# Altium PCB PCB.PcbDoc
Units mil, origin at the board's own origin, x right, y up, seen from the top; angles counter-clockwise.
Board outline 3937.01 x 3543.31 mil, 2 copper layers (Top Layer, Bottom Layer); 61 components, 49 nets, 220 pads, 51 vias.
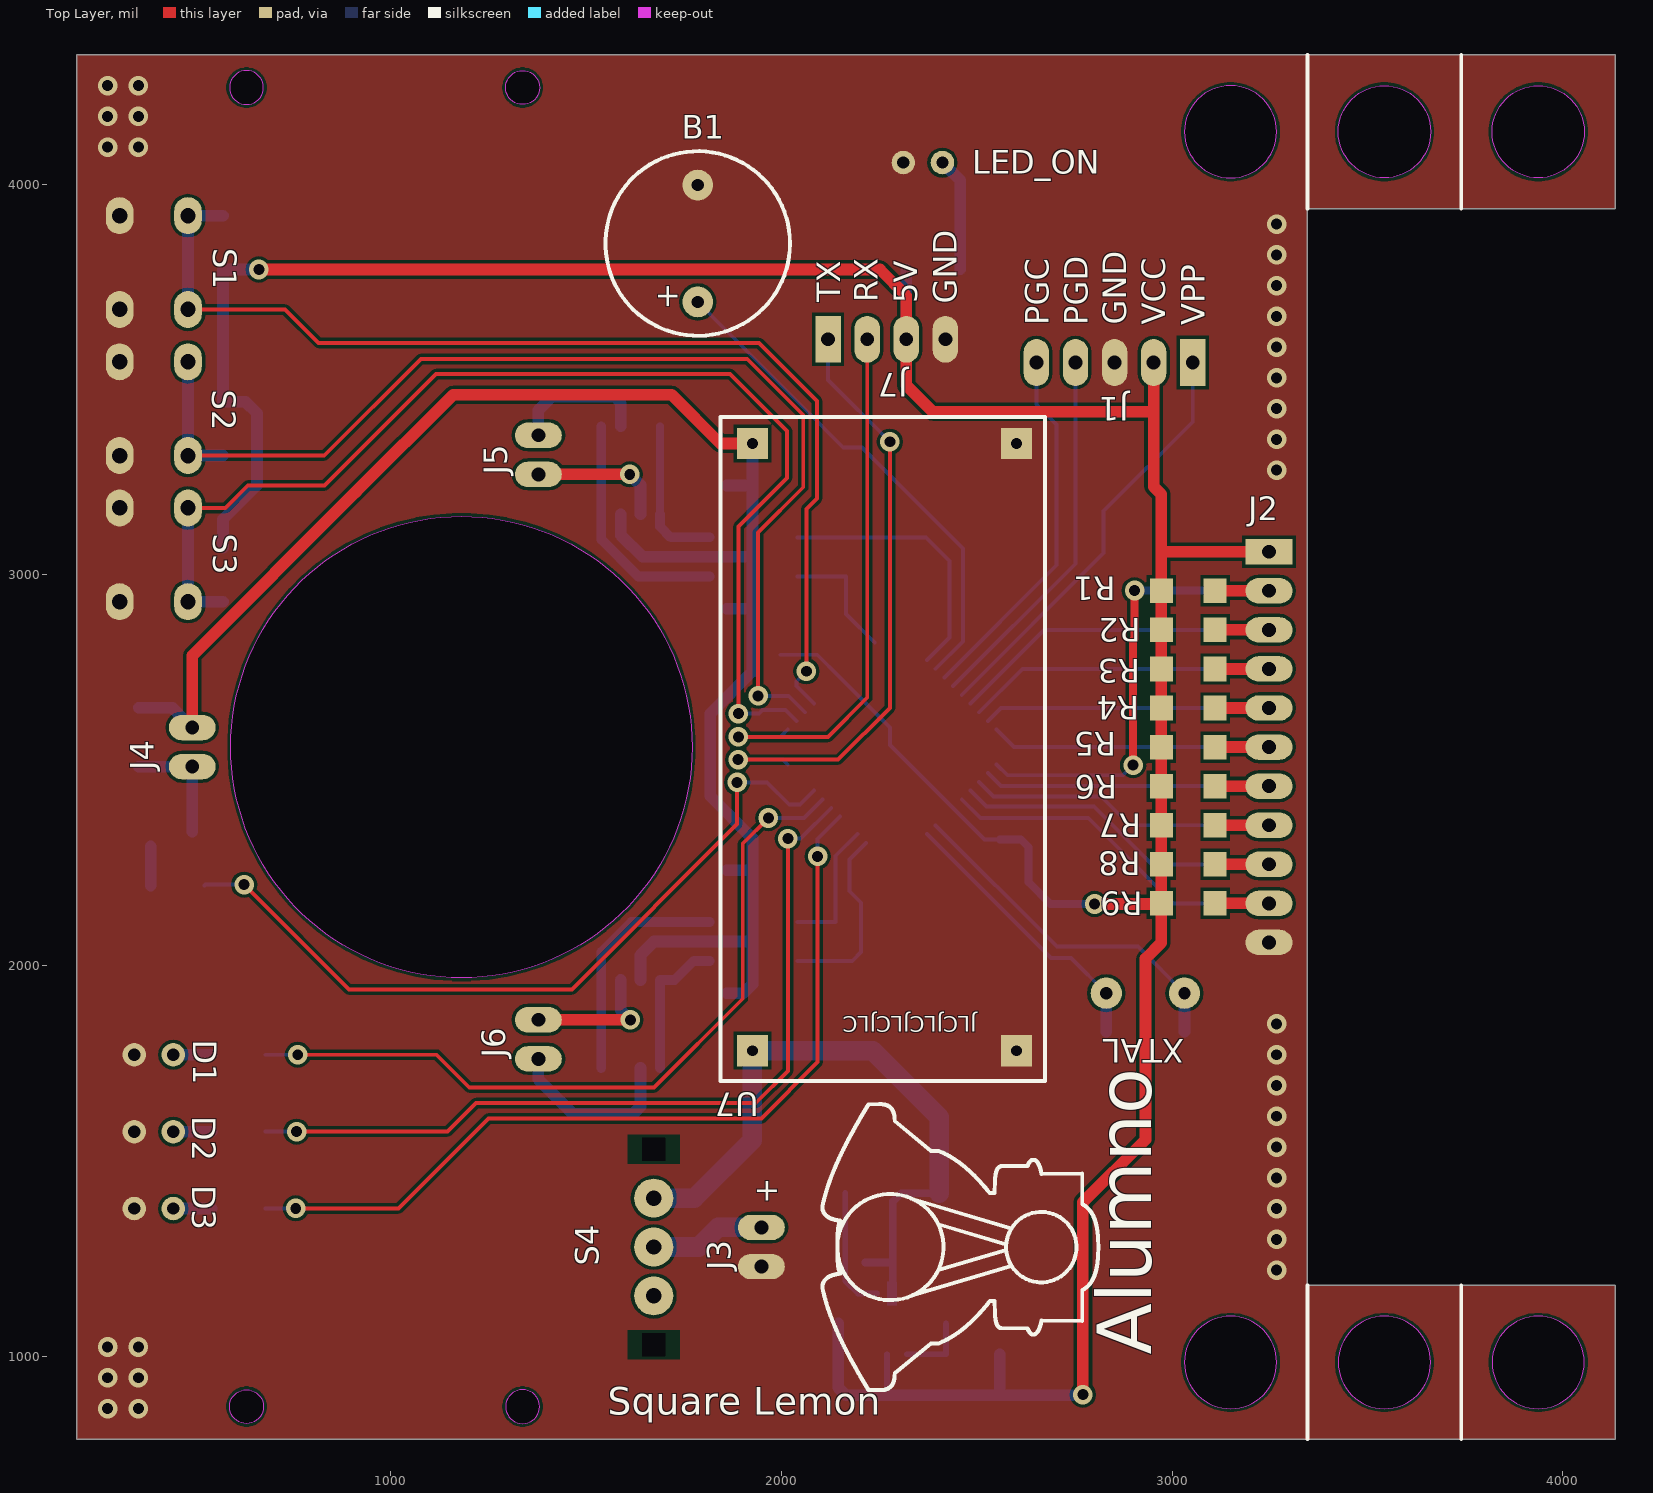
[diagram p0: Top Layer view]
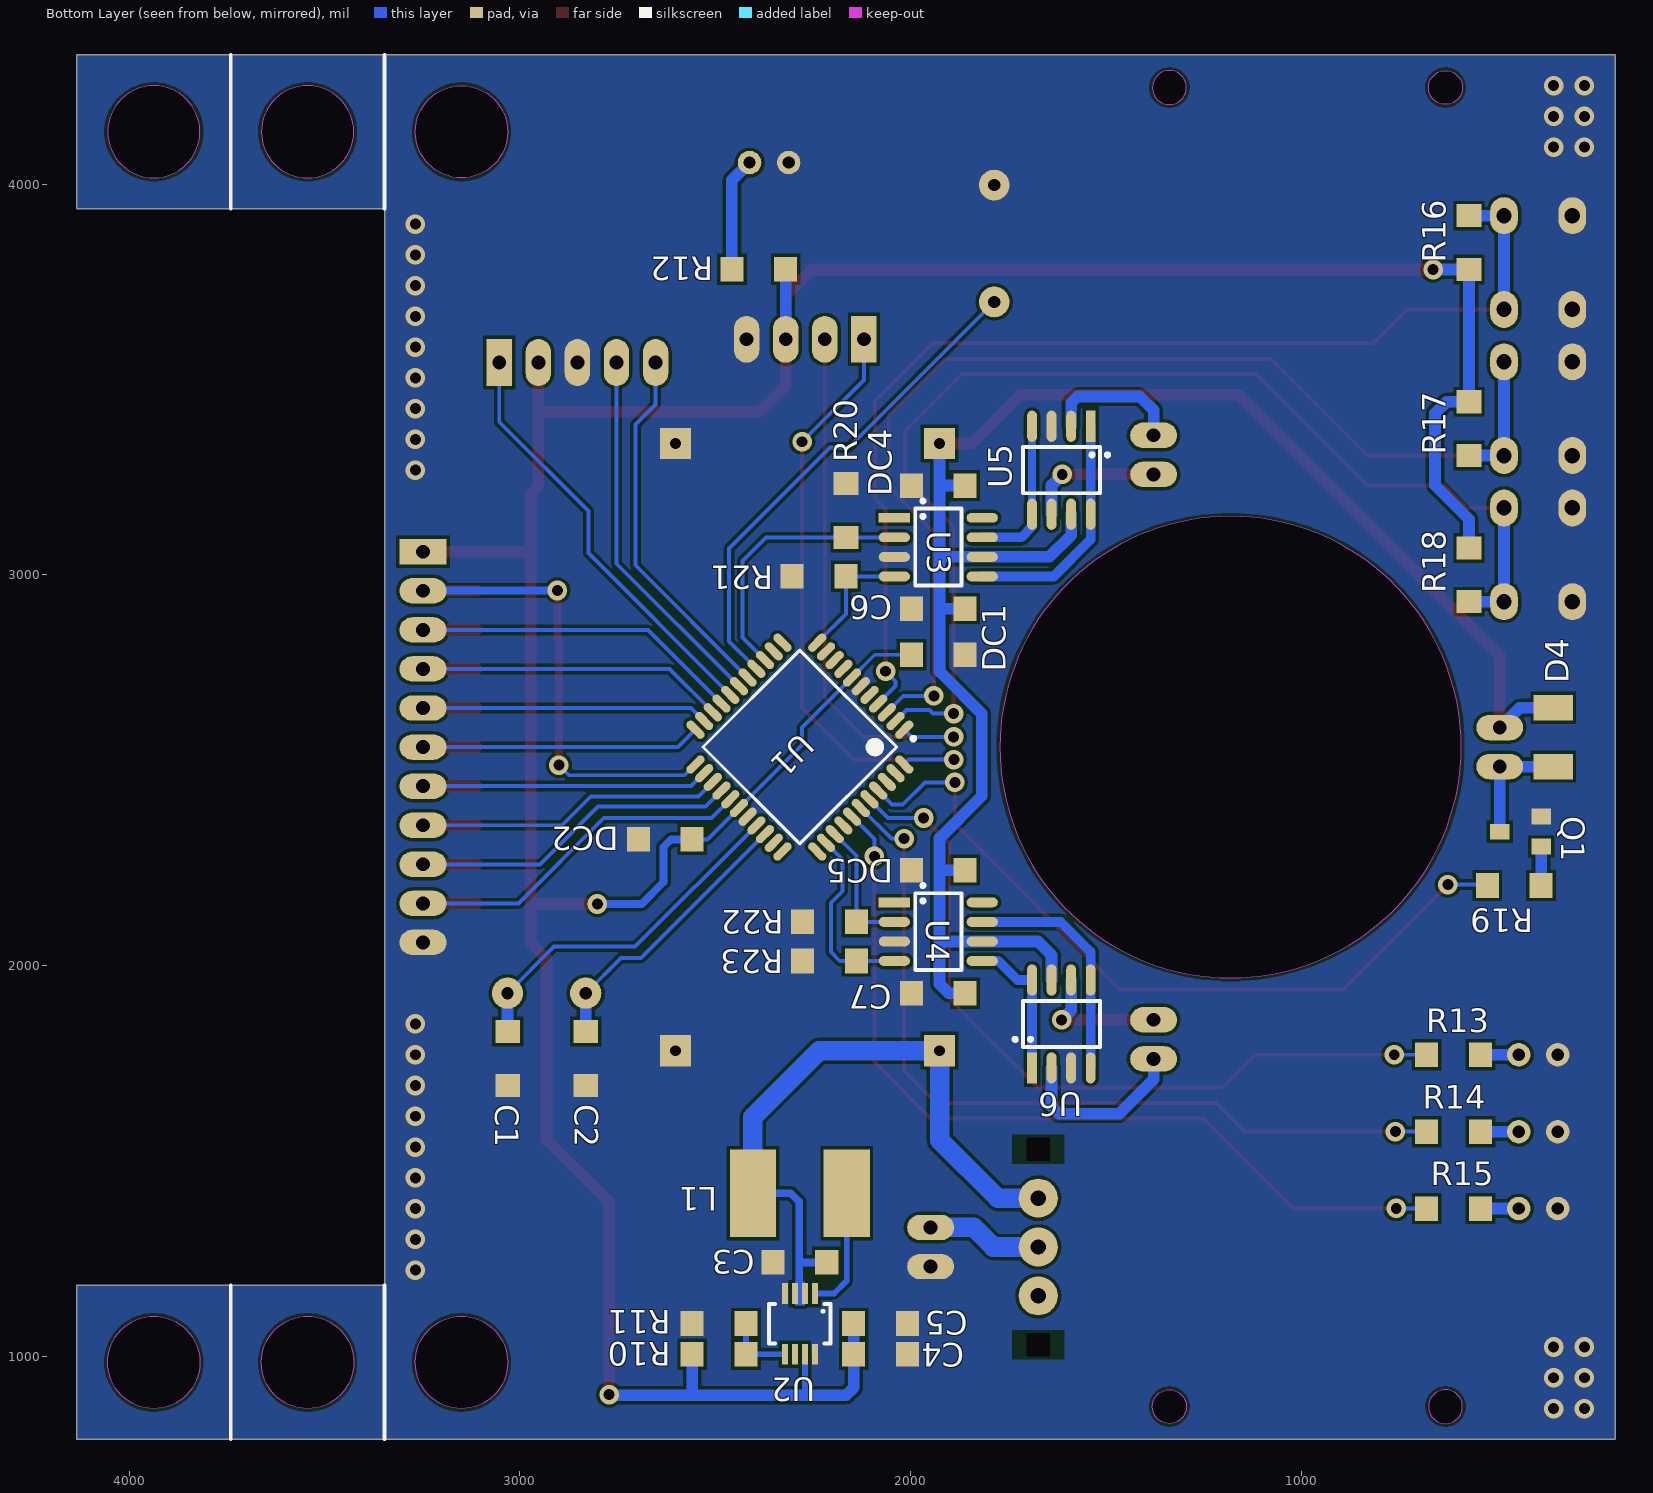
[diagram p1: Bottom Layer view, seen from below]
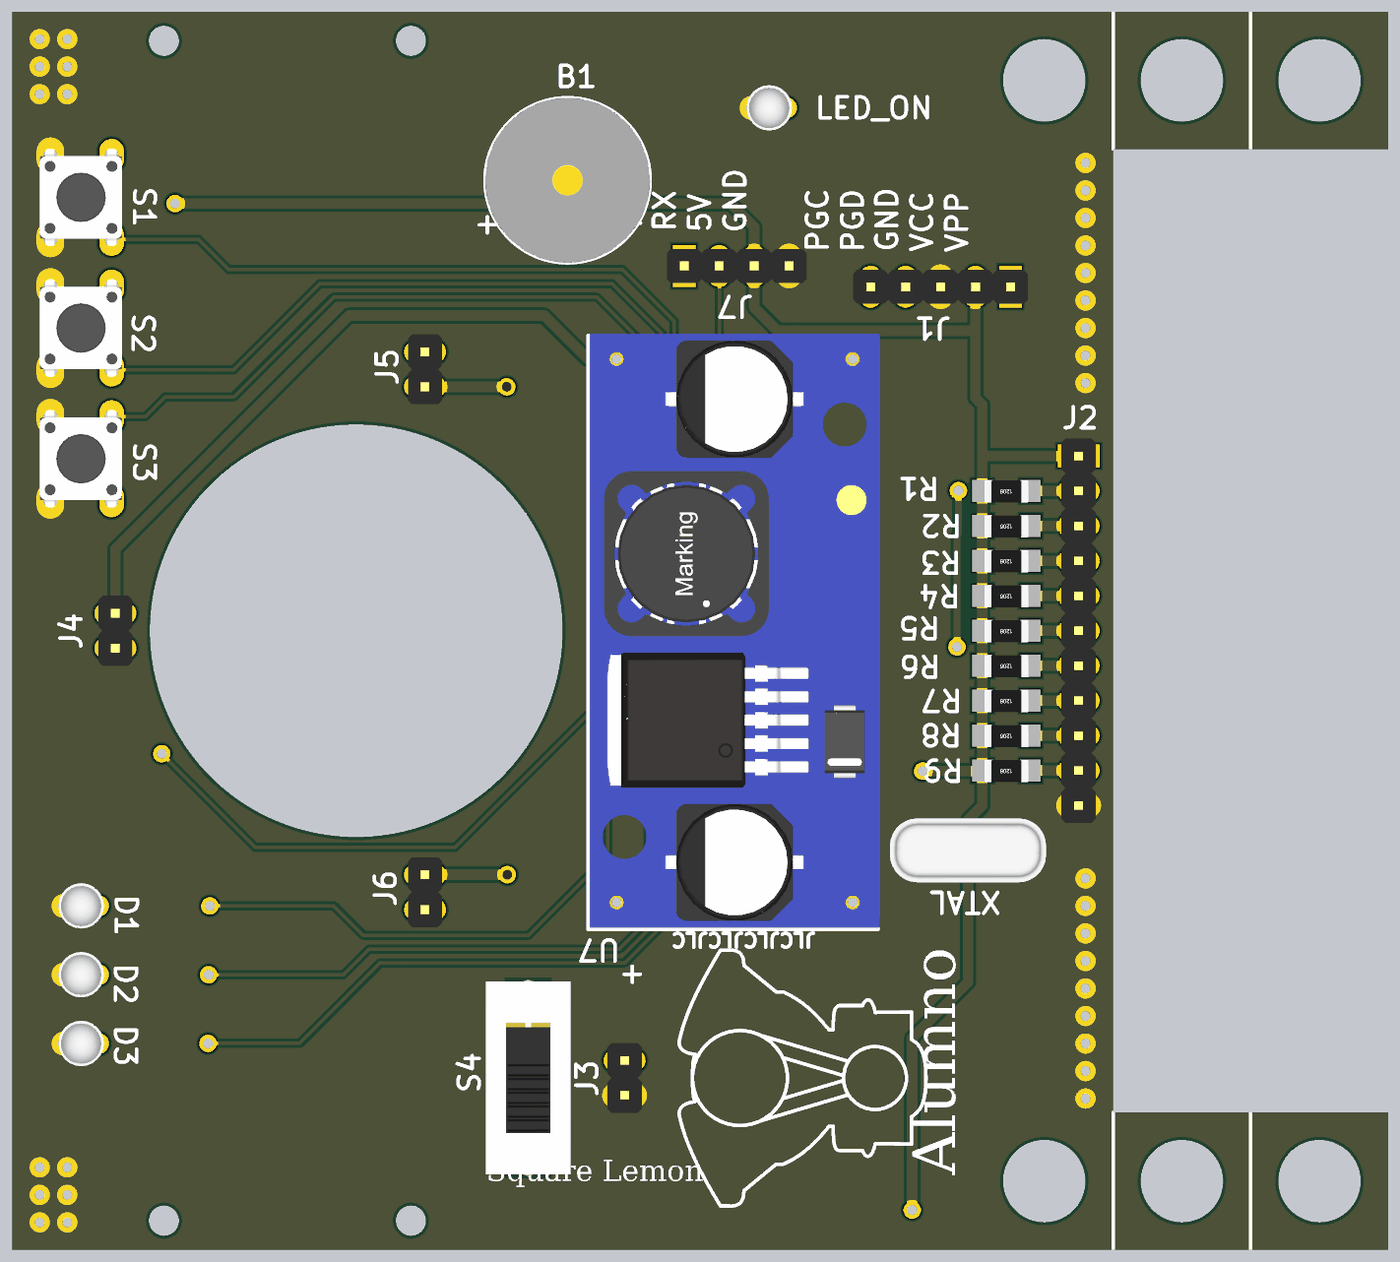
[diagram p2: 3D render of the assembled board from above, using the file's embedded part models]
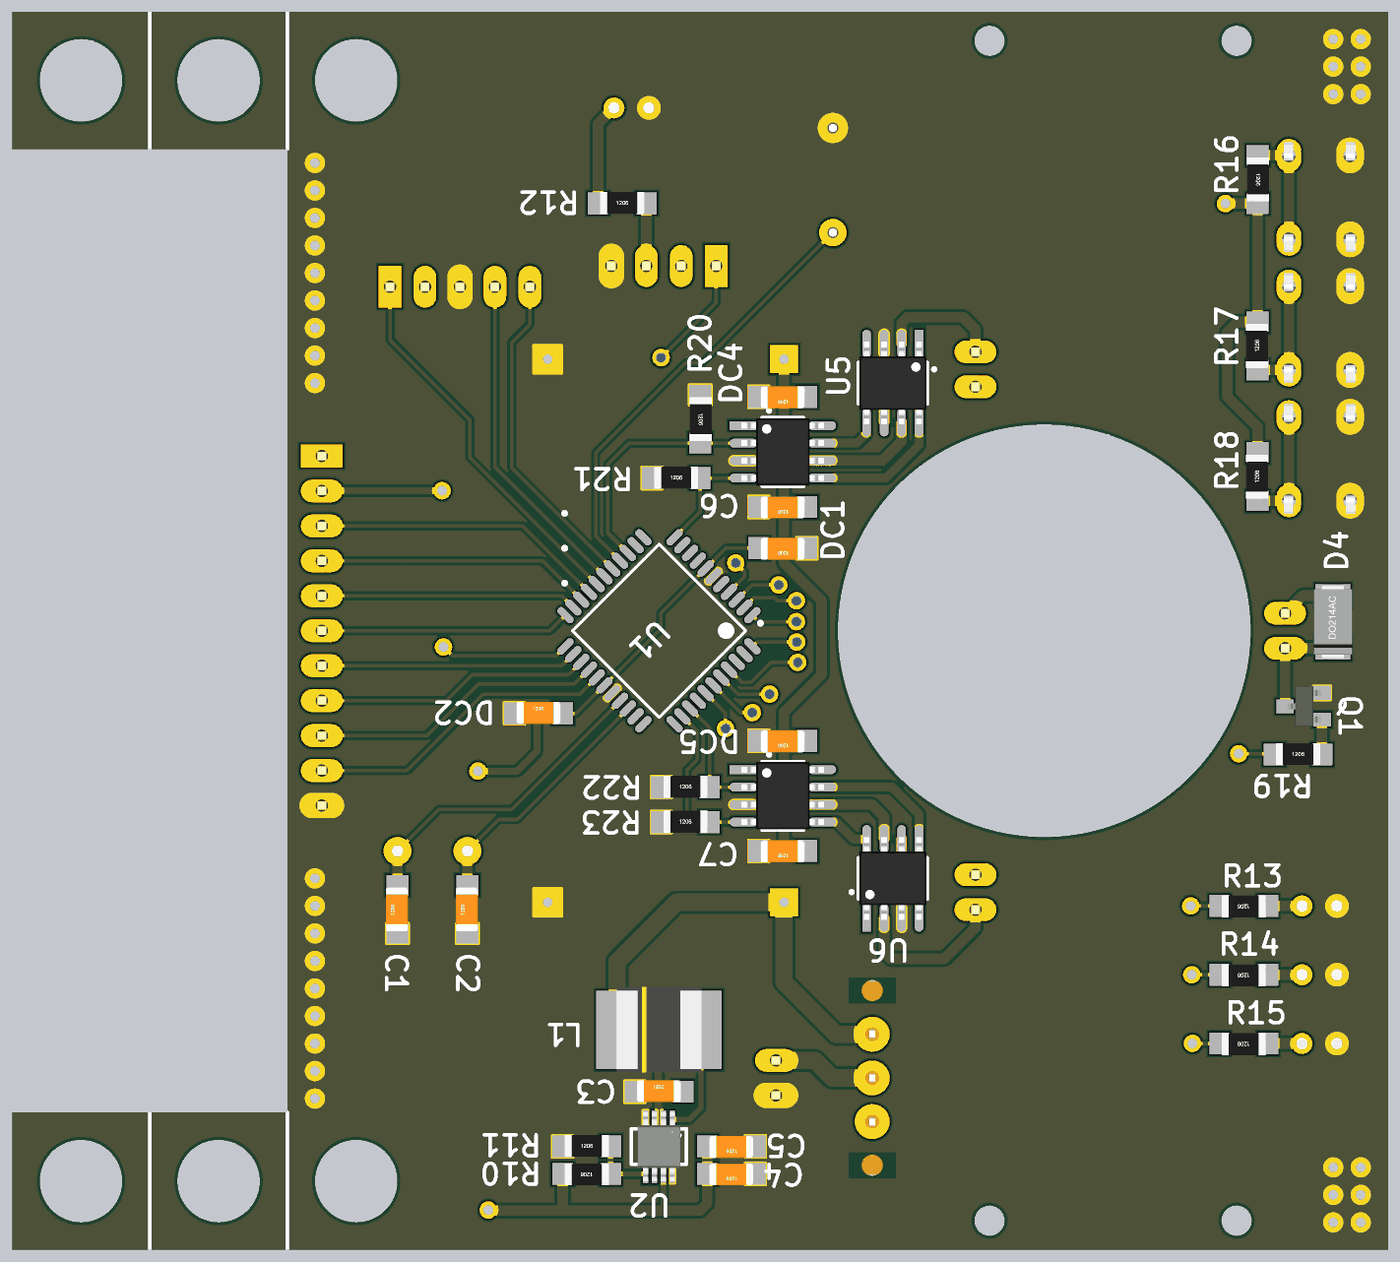
[diagram p3: 3D render of the assembled board from below, using the file's embedded part models]

## Layer stack, top to bottom
Top Solder: solder mask 0.4, Solder Resist, Dk 3.5
Top Layer: signal copper 1.4
Dielectric 1: dielectric 12.6, FR-4, Dk 4.8
Bottom Layer: signal copper 1.4
Bottom Solder: solder mask 0.4, Solder Resist, Dk 3.5

## Board outline
196.85,787.4 196.85,4330.71 4133.86,4330.71 4133.86,3937.01 3346.46,3937.01 3346.46,1181.1 4133.86,1181.1 4133.86,787.4 3346.46,787.4
cut-out: 630.91,4290.35 ccw(c630.91,4247.05) 587.6,4247.05 ccw(c630.91,4247.05) 630.91,4203.74 ccw(c630.91,4247.05) 674.21,4247.05 ccw(c630.91,4247.05)
cut-out: 1294.29,4247.05 cw(c1337.6,4247.05) 1337.6,4290.35 cw(c1337.6,4247.05) 1380.91,4247.05 cw(c1337.6,4247.05) 1337.6,4203.74 cw(c1337.6,4247.05)
cut-out: 1294.29,871.06 ccw(c1337.6,871.06) 1337.6,827.76 ccw(c1337.6,871.06) 1380.91,871.06 ccw(c1337.6,871.06) 1337.6,914.37 ccw(c1337.6,871.06)
cut-out: 630.91,827.76 cw(c630.91,871.06) 587.6,871.06 cw(c630.91,871.06) 630.91,914.37 cw(c630.91,871.06) 674.21,871.06 cw(c630.91,871.06)
cut-out: 3543.31,4015.75 cw(c3543.31,4133.86) 3425.2,4133.86 cw(c3543.31,4133.86) 3543.31,4251.97 cw(c3543.31,4133.86) 3661.42,4133.86 cw(c3543.31,4133.86)
cut-out: 3425.2,984.25 ccw(c3543.31,984.25) 3543.31,866.14 ccw(c3543.31,984.25) 3661.42,984.25 ccw(c3543.31,984.25) 3543.31,1102.36 ccw(c3543.31,984.25)
cut-out: 3818.9,984.25 ccw(c3937.01,984.25) 3937.01,866.14 ccw(c3937.01,984.25) 4055.12,984.25 ccw(c3937.01,984.25) 3937.01,1102.36 ccw(c3937.01,984.25)
cut-out: 1181.1,1968.5 cw(c1181.1,2559.05) 590.55,2559.05 cw(c1181.1,2559.05) 1181.1,3149.61 cw(c1181.1,2559.05) 1771.65,2559.05 cw(c1181.1,2559.05)
cut-out: 3937.01,4015.75 cw(c3937.01,4133.86) 3818.9,4133.86 cw(c3937.01,4133.86) 3937.01,4251.97 cw(c3937.01,4133.86) 4055.12,4133.86 cw(c3937.01,4133.86)
cut-out: 3031.5,984.25 ccw(c3149.61,984.25) 3149.61,866.14 ccw(c3149.61,984.25) 3267.72,984.25 ccw(c3149.61,984.25) 3149.61,1102.36 ccw(c3149.61,984.25)
cut-out: 3031.5,4133.86 ccw(c3149.61,4133.86) 3149.61,4015.75 ccw(c3149.61,4133.86) 3267.72,4133.86 ccw(c3149.61,4133.86) 3149.61,4251.97 ccw(c3149.61,4133.86)

## Design rules (kind name [scope] priority, off if disabled: settings)
Clearance [All] p1: gap=8
ComponentClearance [All] p1 off: gap=10 collisioncheckmode=3 verticalgap=10 showdistances=FALSE
HoleSize [All] p1: absolutevalues=TRUE maxlimit=196.85 minlimit=1 maxpercent=80.000 minpercent=20.000
PlaneConnect [All] p1: planeconnectstyle=Direct reliefexpansion=20 reliefentries=4 reliefconductorwidth=10 reliefairgap=10
PolygonConnect [All] p1: connectstyle=Direct reliefconductorwidth=15 reliefentries=4 polygonreliefangle="90 Angle" airgapwidth=10
RoutingVias [All] p1: holewidth=28 width=50 viastyle="Through Hole" minholewidth=28 minwidth=50 maxholewidth=28 maxwidth=50
SolderMaskExpansion [All] p1: expansion=4
Width [All] p1: maxlimit=50 minlimit=8 preferedwidth=10
27 further rules are at their usual default settings.

## Components (designator, comment, footprint, x,y, rotation, side; value= is the part's Value field where it differs from the comment)
B1 "12mm" BUZZER-12MM 1785.83,3848.03 r90 top
C1 "CAP-CER" C1206 3031.5,1761.81 r90 bottom
C2 "CAP-CER" C1206 2831.5,1761.81 r90 bottom
C3 "CAP-CER" C1206 2283.46,1240.16 r180 bottom
C4 "CAP-CER" C1206 2076.77,1004.92 r0 bottom
C5 "CAP-CER" C1206 2076.77,1083.66 r0 bottom
C6 "CAP-CER" C1206 1929.13,2913.39 r0 bottom
C7 "CAP-CER" C1206 1929.13,1929.13 r0 bottom
D1 "LED" LED-3MM-RED 393.7,1771.65 r180 top
D2 "LED" LED-3MM-YELLOW 393.7,1574.8 r180 top
D3 "LED" LED-3MM-GREEN 393.7,1377.95 r180 top
D4 "1N4007" DO-214AC 355.12,2584.45 r90 bottom
DC1 "CAP-CER" C1206 1929.13,2795.28 r0 bottom
DC2 "CAP-CER" C1206 2627.95,2322.83 r180 bottom
DC4 "CAP-CER" C1206 1929.13,3228.35 r0 bottom
DC5 "CAP-CER" C1206 1929.13,2244.09 r0 bottom
J1 "PICkit" "Header 1x5" 3052.76,3543.31 r270 top
J2 "Sensores" "Header 1x11" 3248.03,3059.06 r0 top
J3 "BAT" "HEADER 1x2" 1948.82,1279.53 r0 top
J4 "EDF" "HEADER 1x2" 492.13,2559.06 r0 top
J5 "MOTI" "HEADER 1x2" 1377.95,3307.09 r0 top
J6 "MOTD" "HEADER 1x2" 1377.95,1811.02 r180 top
J7 "UART" "Header 1x4" 2269.68,3602.76 r90 top
L1 "NR6028T2R2N" NR6028 2283.46,1417.32 r180 bottom
LED_ON "LED" LED-3MM-RED 2362.2,4055.12 r180 top
Q1 "MMBT2222A" SOT-23 512.13,2067.52 r90 bottom
R1 "RES" R1206 3041.34,2959.06 r180 top
R2 "RES" R1206 3041.34,2859.06 r180 top
R3 "RES" R1206 3041.34,2759.06 r180 top
R4 "RES" R1206 3041.34,2659.06 r180 top
R5 "RES" R1206 3041.34,2559.06 r180 top
R6 "RES" R1206 3041.34,2459.06 r180 top
R7 "RES" R1206 3041.34,2359.06 r180 top
R8 "RES" R1206 3041.34,2259.06 r180 top
R9 "RES" R1206 3041.34,2159.06 r180 top
R10 "RES" R1206 2490.16,1004.92 r0 bottom
R11 "RES" R1206 2490.16,1083.66 r180 bottom
R12 "RES" R1206 2388.58,3781.89 r180 bottom
R13 "RES" R1206 610.24,1771.65 r0 bottom
R14 "RES" R1206 610.24,1574.8 r0 bottom
R15 "RES" R1206 610.24,1377.95 r0 bottom
R16 "RES" R1206 570.87,3850.32 r270 bottom
R17 "RES" R1206 570.87,3374.09 r90 bottom
R18 "RES" R1206 570.87,3000.08 r90 bottom
R19 "RES" R1206 455.04,2204.72 r180 bottom
R20 "RES" R1206 2165.35,3164.76 r270 bottom
R21 "RES" R1206 2234.25,2995.87 r180 bottom
R22 "RES" R1206 2207.87,2111.61 r180 bottom
R23 "RES" R1206 2207.87,2011.61 r180 bottom
S1 "BUTTON" TACT_SWITCH-SMALL-4PIN 393.7,3799.21 r90 top
S2 "BUTTON" TACT_SWITCH-SMALL-4PIN 393.7,3425.2 r90 top
S3 "BUTTON" TACT_SWITCH-SMALL-4PIN 393.7,3051.18 r90 top
S4 "SLIDE-SWITCH" SWITCH 1673.23,1279.53 r270 top
U1 "PIC18F4550-I/PT" TQFP-PT44_L 2283.46,2559.06 r315 bottom
U2 "PAM2401" MSOP-8 2283.46,1082.68 r270 bottom
U3 "MIC4427" SOIC-8 1929.13,3070.87 r180 bottom
U4 "MIC4427" SOIC-8 1929.13,2086.61 r180 bottom
U5 "ZXMHC3F381N8" SOIC-8 1614.17,3267.72 r270 bottom
U6 "ZXMHC3F381N8" SOIC-8 1614.17,1850.39 r90 bottom
U7 "XL6009 Module" "XL6009 mdl" 2263.78,2559.06 r90 top
XTAL "XTAL" HC-49/S 2931.5,1929.13 r0 top

## Footprints (in the part's own frame and the unit in brackets; to place one, negate y for a bottom-side part, rotate by r counter-clockwise, add the part's x,y. Pads: shape width x height; smd on the part's side, far side on the other; paste and mask are expansions set on the pad)
BUZZER-12MM [mm]
  round 2 hole 0.8: 1(-3.8,0) 2(3.8,0)
  silkscreen extent -6,-6 6,6, body extent -6,-6 6,6, height 9.5
C1206 [mm]
  rect 1.5x1.6 smd: 1(-1.75,0) 2(1.75,0)
  body extent -1.6,-0.76 1.6,0.84, height 1.26
DO-214AC [mil]
  rect 65x100 smd: A(-75.39,0) K(75.39,0)
  body extent -108,-55 108,55, height 90
HC-49/S [mil]
  round 80 hole 31.5: 1(-100,0) 2(100,0)
  body extent -223,-90 223,93, height 138
"HEADER 1x2" [mil]
  oval 120x65 hole 35.43: 1(0,50) 2(0,-50)
  body extent -49,-100 49,100, height 336
"Header 1x4" [mil]
  rect 120x65 hole 35.43: 1(0,150)
  oval 120x65 hole 35.43: 2(0,50) 3(0,-50) 4(0,-150)
  body extent -49,-200 49,200, height 336
"Header 1x5" [mil]
  rect 120x65 hole 35.43: 1(0,0)
  oval 120x65 hole 35.43: 2(0,-100) 3(0,-200) 4(0,-300) 5(0,-400)
  body extent -49,-450 49,50, height 336
"Header 1x11" [mil]
  rect 120x65 hole 35.43: 1(0,0)
  oval 120x65 hole 35.43: 2(0,-100) 3(0,-200) 4(0,-300) 5(0,-400) 6(0,-500) 7(0,-600) 8(0,-700) 9(0,-800) 10(0,-900) 11(0,-1000)
  body extent -49,-1050 49,50, height 336
LED-3MM-GREEN [mil]
  round 60 hole 31.5: A(-50,0) K(50,0)
  body extent -66,-65 64,65, height 217
LED-3MM-RED [mil]
  round 60 hole 31.5: A(-50,0) K(50,0)
  body extent -66,-65 64,65, height 217
LED-3MM-YELLOW [mil]
  round 60 hole 31.5: A(-50,0) K(50,0)
  body extent -66,-65 64,65, height 217
MSOP-8 [mm]
  rect 1.35x0.381 smd: 1(-1.975,0.975) 2(-1.975,0.325) 3(-1.975,-0.325) 4(-1.975,-0.975) 5(1.975,-0.975) 6(1.975,-0.325) 7(1.975,0.325) 8(1.975,0.975)
  silkscreen extent -1.3,-2 1.28,2, body extent -2.53,-1.55 2.53,1.55, height 1.09
NR6028 [mm]
  rect 3x5.7 smd: 1(-3.05,0) 2(3.05,0)
  body extent -3.1,-3.1 3.1,3.1, height 2.79
R1206 [mm]
  rect 1.5x1.6 smd: 1(-1.75,0) 2(1.75,0)
  body extent -1.6,-0.76 1.6,0.84, height 0.68
SOIC-8 [mil]
  rect 80x25 smd: 1(-112.5,75)
  oval 80x25 smd: 2(-112.5,25) 3(-112.5,-25) 4(-112.5,-75) 5(112.5,-75) 6(112.5,-25) 7(112.5,25) 8(112.5,75)
  silkscreen extent -59,-98 59,122, body extent -118,-96 118,96, height 69
SOT-23 [mil]
  rect 40x50 smd: B(237.2,-125.98) C(275,-20) E(313.98,-125.98)
  body extent 218,-124 333,-27, height 38
SWITCH [mm]
  round 2.54 hole 1: 1(-3.175,0) 2(0,0) 3(3.175,0)
  round 0 hole 1.5 square: 4(-6.35,0)
  rect 0x0 hole 1.5 square: 4(6.35,0)
  body extent -7,-3.1 7,3.1, height 9.65
TACT_SWITCH-SMALL-4PIN [mm]
  oval 2.4x1.8 hole 1: 1(-3.048,2.222) 1(3.048,2.223) 2(-3.048,-2.223) 2(3.048,-2.222)
  body extent -3.99,-3 3.99,3, height 5.15
TQFP-PT44_L [mm] "Thin QFP, 44-Leads, Body 10x10mm, Pitch 0.8mm, IPC High Density"
  oval 1.45x0.55 smd: 1(-5.6,4) 2(-5.6,3.2) 3(-5.6,2.4) 4(-5.6,1.6) 5(-5.6,0.8) 6(-5.6,0) 7(-5.6,-0.8) 8(-5.6,-1.6) 9(-5.6,-2.4) 10(-5.6,-3.2) 11(-5.6,-4) 23(5.6,-4) 24(5.6,-3.2) 25(5.6,-2.4) 26(5.6,-1.6) 27(5.6,-0.8) 28(5.6,0) 29(5.6,0.8) 30(5.6,1.6) 31(5.6,2.4) 32(5.6,3.2) 33(5.6,4)
  oval 0.55x1.45 smd: 12(-4,-5.6) 13(-3.2,-5.6) 14(-2.4,-5.6) 15(-1.6,-5.6) 16(-0.8,-5.6) 17(0,-5.6) 18(0.8,-5.6) 19(1.6,-5.6) 20(2.4,-5.6) 21(3.2,-5.6) 22(4,-5.6) 34(4,5.6) 35(3.2,5.6) 36(2.4,5.6) 37(1.6,5.6) 38(0.8,5.6) 39(0,5.6) 40(-0.8,5.6) 41(-1.6,5.6) 42(-2.4,5.6) 43(-3.2,5.6) 44(-4,5.6)
  silkscreen extent -5.72,-4.45 4.45,4.95, body extent -5,-5 5,5, height 1.2
"XL6009 mdl" [mil]
  rect 80x80 hole 27.56: 0(-777,338) 1(-777,-338) 2(777,-338) 3(777,338)
  silkscreen extent -855,-411 845,419, body extent -850,-415 850,415, height 502

## Part data
B1: library part BUZZER-ACTIVE
D4: library part DIODE
J2: library part "Header 1x11"
J3 J4 J5 J6: library part "Header 1x2"
J7: library part "Header 1x4"
L1: library part INDUCTOR
Q1: library part NPN
U1: "High Performance, Enhanced Flash, USB Microcontroller with nanoWatt Technology, 32K Flash, 44-Pin TQFP, Industrial Temperature Range"
U3 U4: library part 4427

## Via types
v1: diameter 50, hole 28, Top Layer to Bottom Layer, 51 vias

## Nets (pads, with @x,y where several pads share a name; then routed paths per layer and width w, separated by ;. In a path a pad name is that pad's centre, name@x,y a point inside that pad or via, vN(x,y) a via of type N, cw(c..) or ccw(c..) an arc to the next point about the centre after c; other vN are vias at no path point)
BTN1: R16.1 S1.2 U1.4 | length 2851.1
  Top Layer w10: S1.2@481.2,3679.21 729.45,3679.21 815.75,3592.91 1942.52,3592.91 2090.94,3444.49 2090.94,3195.67 2063.78,3168.5 v1(2063.78,2753.15)
  Bottom Layer w10: v1(2063.78,2753.15) 2038.19,2727.56 2038.19,2715.25 U1.4
  Bottom Layer w30: S1.2@481.2,3679.21 481.2,3919.21 R16.1
BTN2: R17.1 S2.2 U1.3 | length 2970.4
  Top Layer w10: S2.2@481.2,3305.2 830,3305.2 1077.17,3552.36 1912.6,3552.36 2055.91,3409.06 2055.91,3224.02 1940.55,3108.66 v1(1940.55,2690.16)
  Bottom Layer w10: v1(1940.55,2690.16) 2018.74,2690.16 U1.3
  Bottom Layer w30: S2.2@481.2,3545.2 481.2,3305.2 R17.1
BTN3: R18.1 S3.2 U1.2 | length 3003.4
  Top Layer w10: S3.2@481.2,3171.18 577.09,3171.18 634.25,3228.35 830.71,3228.35 1116.14,3513.78 1868.9,3513.78 2014.57,3368.11 2014.57,3248.03 1890.16,3123.62 v1(1890.16,2644.88)
  Bottom Layer w10: v1(1890.16,2644.88) 1942.91,2644.88 1951.57,2653.54 2010.81,2653.54 U1.2
  Bottom Layer w30: S3.2@481.2,3171.18 481.2,2931.18 R18.1
BUZZER: B1.1 U1.15 | length 1276.9
  Bottom Layer w10: B1.1 2158.27,3325.98 2205.91,3325.98 2464.57,3067.32 2464.57,2829.24 U1.15
EDF: R19.1 U1.41 | length 1991.3
  Top Layer w10: v1(624.8,2207.09) 892.91,1938.98 1463.78,1938.98 1886.61,2361.81 v1(1886.61,2468.5)
  Bottom Layer w10: R19.1 526.3,2207.09 v1(624.8,2207.09) ; v1(1886.61,2468.5) 1963.39,2468.5 2020.08,2411.81 2047.14,2411.81 U1.41
GND: B1.2 C1.1 C2.1 C3.1 C4.1 C5.1 C6.2 C7.2 D1.K D2.K D3.K DC1.1 DC2.1 DC4.2 DC5.2 J1.3 J2.11 J3.2 J7.4 LED_ON.K Q1.E R11.1 R20.1 R21.1 R22.1 R23.1 S1.1 S2.1 S3.1 U1.6 U1.29 U2.4 U2.8 U3.3 U4.3 U5.3 U6.3 U7.1 U7.2
  other v1: 275.59,866.14 354.33,866.14 275.59,944.88 354.33,944.88 275.59,1023.62 354.33,1023.62 3267.72,1220.47 3267.72,1299.21 3267.72,1377.95 3267.72,1456.69 3267.72,1535.43 3267.72,1614.17 3267.72,1692.91 3267.72,1771.65 3267.72,1850.39 3267.72,3267.72 3267.72,3346.46 3267.72,3425.2 3267.72,3503.94 3267.72,3582.68 3267.72,3661.42 3267.72,3740.16 3267.72,3818.9 3267.72,3897.64 275.59,4094.49 354.33,4094.49 275.59,4173.23 354.33,4173.23 275.59,4251.97 354.33,4251.97
IR1: J2.2 R1.1 U1.23 | length 1302.3
  Top Layer w20: v1(2900,2512.72) 2900,2833.07 2903.54,2836.61 2903.54,2959.45 v1(2903.94,2959.84)
  Top Layer w30: R1.1 J2.2
  Bottom Layer w10: U1.23 2578.22,2487.01 2874.29,2487.01 v1(2900,2512.72)
  Bottom Layer w20: v1(2903.94,2959.84) 3247.24,2959.84 J2.2
IR2: J2.3 R2.1 U1.19 | length 980.1
  Top Layer w30: R2.1 J2.3
  Bottom Layer w10: U1.19 2672.55,2859.06 J2.3
IR3: J2.4 R3.1 U1.20 | length 925.6
  Top Layer w30: R3.1 J2.4
  Bottom Layer w10: U1.20 2617.09,2759.06 J2.4
IR4: J2.5 R4.1 U1.21 | length 871.1
  Top Layer w30: R4.1 J2.5
  Bottom Layer w10: U1.21 2561.63,2659.06 J2.5
IR5: J2.6 R5.1 U1.22 | length 853.6
  Top Layer w30: R5.1 J2.6
  Bottom Layer w10: U1.22 2595.26,2559.06 J2.6
IR6: J2.7 R6.1 U1.24 | length 871.1
  Top Layer w30: R6.1 J2.7
  Bottom Layer w10: U1.24 2561.63,2459.06 J2.7
IR7: J2.8 R7.1 U1.25 | length 925.6
  Top Layer w30: R7.1 J2.8
  Bottom Layer w10: U1.25 2543.08,2433.07 2818.67,2433.07 2892.68,2359.06 J2.8
IR8: J2.9 R8.1 U1.26 | length 980.1
  Top Layer w30: R8.1 J2.9
  Bottom Layer w10: U1.26 2524.52,2407.09 2800.11,2407.09 2948.14,2259.06 J2.9
IR9: J2.10 R9.1 U1.27 | length 1034.5
  Top Layer w30: R9.1 J2.10
  Bottom Layer w10: U1.27 2509.9,2377.17 2785.49,2377.17 3003.6,2159.06 J2.10
LED1: R13.2 U1.40 | length 1998.9
  Top Layer w10: v1(762.2,1771.65) 1117.32,1771.65 1201.18,1687.8 1674.02,1687.8 1901.18,1914.96 1901.18,2311.81 v1(1966.93,2377.56)
  Bottom Layer w10: R13.2 v1(762.2,1771.65) ; v1(1966.93,2377.56) 2057.43,2377.56 U1.40
LED2: R14.2 U1.39 | length 2139.8
  Top Layer w10: v1(759.05,1574.8) 1145.28,1574.8 1218.5,1648.03 1934.25,1648.03 2016.54,1730.32 v1(2016.54,2324.8)
  Bottom Layer w10: R14.2 v1(759.05,1574.8) ; v1(2016.54,2324.8) 2049.21,2324.8 U1.39
LED3: R15.2 U1.38 | length 2220.7
  Top Layer w10: v1(757.09,1378.35) 1019.68,1378.35 1250,1608.66 1948.82,1608.66 2092.91,1752.76 v1(2092.91,2279.13)
  Bottom Layer w10: R15.2 756.69,1377.95 v1(757.09,1378.35) ; v1(2092.91,2279.13) 2092.91,2323.96 U1.38
MOTDD: R23.2 U1.35 U4.4 | length 481.2
  Bottom Layer w10: U4.4 R23.2 2181.3,2011.61 2203.94,2034.25 2203.94,2160.63 2174.41,2190.16 2174.41,2271.83 U1.35
MOTDP: R22.2 U1.36 U4.2 | length 345
  Bottom Layer w10: U4.2 R22.2 2138.98,2280.94 U1.36
MOTID: R20.2 U1.14 U3.2 | length 691.5
  Bottom Layer w10: U3.2 2370.28,3095.87 2430.32,3035.83 2430.32,2839.53 U1.14
MOTIP: R21.2 U1.11 U3.4 | length 323.8
  Bottom Layer w10: U3.4 R21.2 2165.35,2899.88 U1.11
NetD1_A: D1.A R13.1 | length 97.6
  Bottom Layer w30: D1.A R13.1
NetD2_A: D2.A R14.1 | length 97.6
  Bottom Layer w30: D2.A R14.1
NetD3_A: D3.A R15.1 | length 97.6
  Bottom Layer w30: D3.A R15.1
NetD4_A: D4.A J4.2 Q1.C | length 303.5
  Bottom Layer w30: D4.A J4.2 Q1.C
NetJ3_1: J3.1 S4.2 | length 296.3
  Bottom Layer w50: S4.2 1788.19,1279.53 1838.19,1329.53 J3.1
NetJ5_1: J5.1 U5.2 | length 356.2
  Bottom Layer w30: J5.1 1377.95,3420.87 1413.39,3456.3 1572.83,3456.3 1589.17,3439.96 U5.2
NetJ5_2: J5.2 U5.6 | length 347.1
  Top Layer w30: J5.2 v1(1611.81,3257.09)
  Bottom Layer w30: v1(1611.81,3257.09) 1639.17,3229.72 U5.6
NetJ6_1: J6.1 U6.2 | length 457
  Bottom Layer w30: J6.1 1377.95,1708.66 1466.14,1620.47 1621.26,1620.47 1639.17,1638.39 U6.2
NetJ6_2: J6.2 U6.6 | length 347.3
  Top Layer w30: J6.2 v1(1613.39,1861.02)
  Bottom Layer w30: U6.6 1589.17,1885.24 v1(1613.39,1861.02)
NetL1_2: L1.2 U2.1 | length 319.3
  Bottom Layer w15: L1.2 2163.39,1193.31 2196.26,1160.43 U2.1
NetLED_ON_A: LED_ON.A R12.1 | length 292
  Bottom Layer w30: LED_ON.A 2457.48,4009.85 R12.1
NetQ1_B: Q1.B R19.2 | length 100
  Bottom Layer w30: R19.2 Q1.B
NetR10_1: R10.1 R11.2 U2.5 | length 178.1
  Bottom Layer w15: U2.5 R10.1 R11.2
NetU3_5: U3.5 U5.1 U5.8 | length 606.5
  Bottom Layer w25: U5.1 U5.8 1539.17,3090.35 1633.66,2995.87 U3.5
NetU3_7: U3.7 U5.4 U5.5 | length 395.7
  Bottom Layer w20: U5.5 U5.4
  Bottom Layer w25: U5.5 1689.17,3123.43 1716.73,3095.87 U3.7
NetU4_5: U4.5 U6.1 U6.8 | length 372.6
  Bottom Layer w25: U6.1 U6.8 1726.67,1962.89 1775.39,2011.61 U4.5
NetU4_7: U4.7 U6.4 U6.5 | length 606.2
  Bottom Layer w25: U6.4 U6.5 1539.17,2034.84 1615.94,2111.61 U4.7
PGC: J1.5 U1.16 | length 946.4
  Bottom Layer w10: U1.16 2704.33,3024.46 2704.33,3384.65 2652.76,3436.22 J1.5
PGD: J1.4 U1.17 | length 958.2
  Bottom Layer w10: U1.17 2752.76,3028.35 J1.4
RX: J7.2 U1.1 | length 1421.9
  Top Layer w10: v1(1890.16,2585.04) 2118.9,2585.04 2219.68,2685.83 J7.2
  Bottom Layer w10: v1(1890.16,2585.04) 1997.65,2585.04 U1.1
TX: J7.1 U1.44 | length 1584
  Top Layer w10: v1(1889.37,2526.77) 2145.28,2526.77 2277.56,2659.06 v1(2277.56,3340.55)
  Bottom Layer w10: v1(1889.37,2526.77) 2003.95,2526.77 U1.44 ; J7.1 2119.68,3498.43 v1(2277.56,3340.55)
VBAT: C3.2 L1.1 S4.1 U2.2 U2.3 U7.0 | length 1718.9
  Bottom Layer w20: C3.2 2285.04,1240.16 ; 2285.04,1160.63 2285.04,1240.16 ; L1.1 2306.69,1417.32 2285.04,1395.67 2285.04,1240.16
  Bottom Layer w50: S4.1 1776.97,1404.53 1925.78,1553.34 U7.0 2233.69,1782.06 2403.54,1612.2 L1.1
VCC: C4.2 C5.2 DC1.2 DC2.2 J1.2 J2.1 J7.3 R1.2 R2.2 R3.2 R4.2 R5.2 R6.2 R7.2 R8.2 R9.2 R10.2 R12.2 R16.2 R17.2 R18.2 U1.7 U1.28 U2.7 | length 8999.6
  Top Layer w30: v1(662.68,3781.42) 2252.44,3781.42 2319.68,3714.17 J7.3 2319.68,3484.65 2387.01,3417.32 2952.76,3417.32 ; v1(2771.65,901.57) 2771.65,1394.09 2931.89,1554.33 2931.89,2017.72 2972.44,2058.27 R9.2 ; v1(2801.57,2157.48) 2970.87,2157.48 R9.2 ; J1.2 2952.76,3417.32 ; J2.1 2972.44,3059.06 ; 2952.76,3417.32 2952.76,3225.59 2972.44,3205.91 2972.44,3059.06 ; R9.2 R8.2 R7.2 R6.2 R5.2 R4.2 R3.2 R2.2 R1.2 2972.44,3059.06
  Bottom Layer w10: DC1.2 2091.79,2795.28 U1.7 2277.95,2609.11 2277.95,2564.57 U1.28 2519.68,2322.83 DC2.2
  Bottom Layer w15: 2270.66,900 U2.7 ; v1@2770.08,900 v1(2771.65,901.57)
  Bottom Layer w20: DC2.2 2612.6,2322.83 2632.68,2302.76 2632.68,2212.99 2688.19,2157.48 v1(2801.57,2157.48)
  Bottom Layer w30: R18.2 570.87,3142.52 657.87,3229.53 657.87,3413.39 628.27,3442.99 R17.2 R16.2 v1(662.68,3781.42) ; C5.2 C4.2 2145.67,919.68 2165.35,900 2270.66,900 2559.06,900 ; J7.3 R12.2 ; R10.2 2559.06,900 ; v1@2770.08,900 2559.06,900
VMOT: C6.1 C7.1 D4.K DC4.1 DC5.1 J4.1 U3.6 U4.6 U5.7 U6.7 U7.3 | length 4627.3
  Top Layer w30: J4.1 492.13,2793.31 911.02,3212.2 1159.84,3461.02 1718.96,3461.02 1843.93,3336.06 U7.3
  Bottom Layer w30: D4.K 441.34,2659.84 J4.1 ; U5.7 1589.17,3101.38 1644.69,3045.87 U3.6 1925.78,3045.87 ; U6.7 1639.17,2026.57 1674.21,2061.61 U4.6 1925.78,2061.61 ; C7.1 1902.76,1929.13 1925.78,1952.16 1925.78,2061.61 ; DC5.1 1925.78,2244.09 ; C6.1 1925.78,2913.39 ; DC4.1 1925.78,3228.35 ; U7.3 1925.78,3228.35 ; 1925.78,2061.61 1925.78,2244.09 ; 1925.78,2244.09 1925.78,2326.19 1818.11,2433.86 1818.11,2644.88 1925.78,2752.55 1925.78,2913.39 ; 1925.78,2913.39 1925.78,3045.87 ; 1925.78,3045.87 1925.78,3228.35
VPP: J1.1 U1.18 | length 1095.5
  Bottom Layer w10: U1.18 2824.41,3055.46 2824.41,3162.99 3052.76,3391.34 J1.1
XTAL1: C1.2 U1.30 XTAL.2 | length 913
  Bottom Layer w10: U1.30 2705.01,2048.43 2912.2,2048.43 XTAL.2
  Bottom Layer w30: C1.2 XTAL.2
XTAL2: C2.2 U1.31 XTAL.1 | length 726
  Bottom Layer w10: U1.31 2690,2018.9 2741.73,2018.9 XTAL.1
  Bottom Layer w30: C2.2 XTAL.1
pads on no net: S4.3 S4.4 U1.5 U1.8 U1.9 U1.10 U1.12 U1.13 U1.32 U1.33 U1.34 U1.37 U1.42 U1.43 U2.6 U3.1 U3.8 U4.1 U4.8

## Polygon pours and split planes (outlines as drawn)
GND on Bottom Layer "BOT-GND" (solid, remove dead copper, pour order 0): 196.85,787.4 196.85,4330.71 4133.86,4330.71 4133.86,3937.01 3346.46,3937.01 3346.46,1181.1 4133.86,1181.1 4133.86,787.4 3346.46,787.4
GND on Top Layer "TOP-GND" (solid, remove dead copper, pour order 2): 196.85,787.4 196.85,4330.71 4133.86,4330.71 4133.86,3937.01 3346.46,3937.01 3346.46,1181.1 4133.86,1181.1 4133.86,787.4 3346.46,787.4

## Other copper
Bottom Layer:
  rectangle net VBAT: 2270.66,1129.92 2296.26,1191.73

## Silkscreen, mask and mechanical layers (free items; w line width, h text height)
Top Overlay:
  drawing of 4426 lines, arcs and shapes, not listed
  text "TX" at 2150,3698.03 h60 r90
  text "RX" at 2246.46,3697.24 h60 r90
  text "5V" at 2347.64,3695.67 h60 r90
  text "GND" at 2448.43,3693.7 h60 r90
  text "GND" at 2883.07,3639.76 h60 r90
  text "VCC" at 2983.07,3639.76 h60 r90
  text "PGC" at 2683.86,3638.98 h60 r90
  text "PGD" at 2784.65,3638.19 h60 r90
  text "VPP" at 3083.07,3638.19 h60 r90
  text "JLCJLCJLCJLC" at 2500,1870.08 h40 r180
  text "+" at 1929.13,1397.64 h60
  text "Alumno" at 2992.13,1003.94 h240 r90
  text "Square Lemon" at 1555.12,826.77 h120
Bottom Overlay:
  lines w10: 3346.46,787.4 3346.46,1181.1 ; 3346.46,3937.01 3346.46,4330.71 ; 3740.16,787.4 3740.16,1181.1 ; 3740.16,3937.01 3740.16,4330.71
Mechanical 1:
  circle w10: c630.91,4247.05 r43.31
  circle w10: c1337.6,4247.05 r43.31
  circle w10: c1337.6,871.06 r43.31
  circle w10: c630.91,871.06 r43.31
  circle w10: c3543.31,4133.86 r118.11
  circle w10: c3543.31,984.25 r118.11
  circle w10: c3937.01,984.25 r118.11
  circle w10: c3937.01,4133.86 r118.11
  circle w10: c1181.1,2559.06 r590.55
  circle w10: c3149.61,984.25 r118.11
  circle w10: c3149.61,4133.86 r118.11
  lines w10: 196.85,787.4 3346.46,787.4 4133.86,787.4 4133.86,1181.1 3346.46,1181.1 3346.46,3937.01 4133.86,3937.01 4133.86,4330.71 3346.46,4330.71 196.85,4330.71 196.85,787.4
Mechanical 2:
  lines w10: 452.76,787.4 452.76,1122.05 688.98,1122.05 688.98,1240.16 748.03,1240.16 748.03,1732.28 1220.47,1732.28 1220.47,1240.16 1279.53,1240.16 1279.53,1122.05 1515.75,1122.05 1515.75,787.4 ; 452.76,4330.71 452.76,3996.06 688.98,3996.06 688.98,3877.95 748.03,3877.95 748.03,3385.83 1220.47,3385.83 1220.47,3877.95 1279.53,3877.95 1279.53,3996.06 1515.75,3996.06 1515.75,4330.71 ; 984.25,787.4 984.25,1732.28

## Text inside footprints (layer, text, board x,y; h text height)
B1: Top Overlay "+" at 1734.65,3678.74 h60 r90